# EAGLE board Digital Lockin PRE Autorouter (EAGLE 9.6.2)
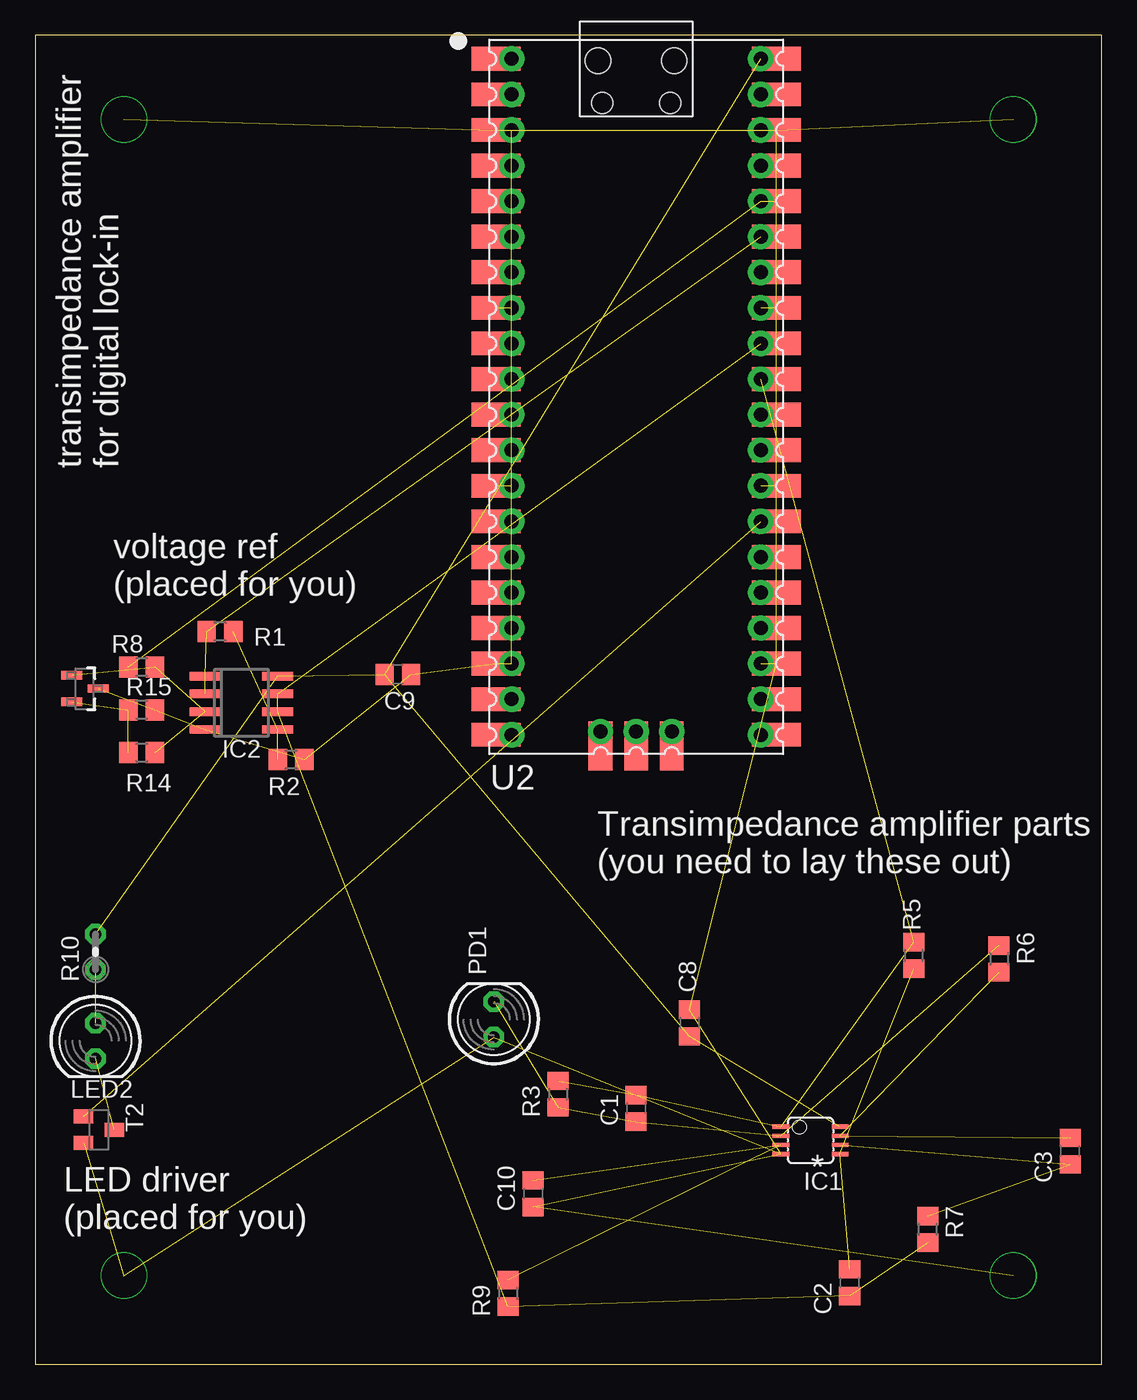
[diagram p0: board, top side]

Size 76.18 x 94.92 mm. Coordinates in mm from the lower left corner, seen from the top.
Outline: 0,0 76.18,0 76.18,94.92 0,94.92 0,0
Copper layers (1*16): Top 0.035mm / dielectric 1.6mm / Bottom 0.035mm
Design rules "jlcpcb-2layers": minimum track width 5mil, minimum drill 0.3mm, track to track 5mil, track to pad 5mil, pad to pad 5mil, via to via 5mil, smd to smd 5mil, copper to edge 0.2mm, drill to drill 6mil, minimum pad ring 10mil, minimum via ring 3mil, stop-mask expansion 4mil, vias tented up to drill 0mil, thermal gap 10mil
Net classes: 1 power: width 0.305 mm

## Footprints (pad centres in the part's own frame; a part is rotated, then mirrored left to right if it is on the bottom)
C0805 = smd 1.3 x 1.5: 1 -0.95,0; 2 0.95,0
MSOP08 = smd 0.3 x 1.2: 1 -0.976,-2.113; 2 -0.326,-2.113; 3 0.324,-2.113; 4 0.974,-2.113; 5 0.974,2.112; 6 0.324,2.112; 7 -0.326,2.112; 8 -0.976,2.112
SO08 = smd 0.6 x 2.2: 1 -1.905,-2.6; 2 -0.635,-2.6; 3 0.635,-2.6; 4 1.905,-2.6; 5 1.905,2.6; 6 0.635,2.6; 7 -0.635,2.6; 8 -1.905,2.6
LED5MM = drill 0.813 octagon: A -1.27,0; K 1.27,0
R0805 = smd 1.3 x 1.5: 1 -0.95,0; 2 0.95,0
0204V = drill 0.813 octagon: 1 -1.27,0; 2 1.27,0
SOT23-BEC = smd 1 x 1.4: B -0.95,-1.1; C 0,1.1; E 0.95,-1.1
PICO-PKG = drill 1: 1 -8.89,24.13; 2 -8.89,21.59; 3 -8.89,19.05; 4 -8.89,16.51; 5 -8.89,13.97; 6 -8.89,11.43; 7 -8.89,8.89; 8 -8.89,6.35; 9 -8.89,3.81; 10 -8.89,1.27; 11 -8.89,-1.27; 12 -8.89,-3.81; 13 -8.89,-6.35; 14 -8.89,-8.89; 15 -8.89,-11.43; 16 -8.89,-13.97; 17 -8.89,-16.51; 18 -8.89,-19.05; 19 -8.89,-21.59; 20 -8.89,-24.13; 21 8.89,-24.13; 22 8.89,-21.59; 23 8.89,-19.05; 24 8.89,-16.51; 25 8.89,-13.97; 26 8.89,-11.43; 27 8.89,-8.89; 28 8.89,-6.35; 29 8.89,-3.81; 30 8.89,-1.27; 31 8.89,1.27; 32 8.89,3.81; 33 8.89,6.35; 34 8.89,8.89; 35 8.89,11.43; 36 8.89,13.97; 37 8.89,16.51; 38 8.89,19.05; 39 8.89,21.59; 40 8.89,24.13; 41 -2.54,-23.9; 42 0,-23.9; 43 2.54,-23.9 | smd 3.5 x 1.7: P$1 -10,24.13; P$2 -10,21.59; P$3 -10,19.05; P$4 -10,16.51; P$5 -10,13.97; P$6 -10,11.43; P$7 -10,8.89; P$8 -10,6.35; P$9 -10,3.81; P$10 -10,1.27; P$11 -10,-1.27; P$12 -10,-3.81; P$13 -10,-6.35; P$14 -10,-8.89; P$15 -10,-11.43; P$16 -10,-13.97; P$17 -10,-16.51; P$18 -10,-19.05; P$19 -10,-21.59; P$20 -10,-24.13; P$21 10,-24.13; P$22 10,-21.59; P$23 10,-19.05; P$24 10,-16.51; P$25 10,-13.97; P$26 10,-11.43; P$27 10,-8.89; P$28 10,-6.35; P$29 10,-3.81; P$30 10,-1.27; P$31 10,1.27; P$32 10,3.81; P$33 10,6.35; P$34 10,8.89; P$35 10,11.43; P$36 10,13.97; P$37 10,16.51; P$38 10,19.05; P$39 10,21.59; P$40 10,24.13 | smd 1.7 x 3.5: P$41 -2.54,-24.925; P$42 0,-24.925; P$43 2.54,-24.925 | hole 1.8: -2.725,24; 2.725,24 | hole 1.5: -2.425,20.97; 2.425,20.97
DBZ0003A_N = smd 1.5 x 0.6: 1 0.95,-0.95; 2 0.95,0.95; 3 -0.95,0

## Placement (x,y rotation side)
C1  5 pF  [C0805]  42.93,18.29 90 top
C2  0.1 uF  [C0805]  58.17,5.84 270 top
C3  0.1 uF  [C0805]  73.91,15.24 270 top
C8  0.1 uF  [C0805]  46.74,24.38 90 top
C9  0.1 uF  [C0805]  25.91,49.28 180 top
C10  0.1 uF  [C0805]  35.56,12.19 90 top
IC1  OPA2650E  [MSOP08]  55.37,16 270 top
IC2  LM358D  [SO08]  14.73,47.24 270 top
LED2  DNP  [LED5MM]  4.32,23.11 270 top
PD1  DNP  [LED5MM]  32.77,24.64 90 top
R1  1k  [R0805]  13.21,52.32 180 top
R2  1k  [R0805]  18.29,43.18 180 top
R3  1M  [R0805]  37.34,19.3 270 top
R5  1M  [R0805]  62.74,29.21 270 top
R6  100k  [R0805]  68.83,28.96 270 top
R7  1M  [R0805]  63.75,9.65 90 top
R8  1 k  [R0805]  7.62,49.78 180 top
R9  100k  [R0805]  33.78,5.08 270 top
R10  DNP  [0204V]  4.32,29.46 90 top
R14  1 k  [R0805]  7.62,43.69 0 top
R15  5k  [R0805]  7.62,46.74 180 top
T2  NPN  [SOT23-BEC]  4.57,16.76 270 top
U2  RASPBERRY_PICOSMD-TH  [PICO-PKG]  42.93,69.09 0 top
U5  TL431AIDBZR  [DBZ0003A_N]  3.56,48.26 180 top

## Library data of the parts
C1 = rcl; SPICEPREFIX: C
C2 C3 C8-C10 = rcl; LCSC_PART#: C28233; SPICEPREFIX: C
IC1 = burr-brown; ACTUAL_PART: OPA2381; LCSC_PART#: C181662; OC_FARNELL: unknown; OC_NEWARK: unknown
IC2 = linear; LCSC_PART#: C7950
LED2 PD1 = led
R1 R2 R8 R14 = rcl; LCSC_PART#: C17513; SPICEPREFIX: R
R3 R5 R7 = rcl; LCSC_PART#: C17514; SPICEPREFIX: R
R6 R9 = rcl; LCSC_PART#: C149504; SPICEPREFIX: R
R10 R15 = rcl; SPICEPREFIX: R
T2 = transistor; LCSC_PART#: C2145
U2 = RpiPico
U5 = tl431; COPYRIGHT: Copyright (C) 2025 Ultra Librarian. All rights reserved.; LCSC_PART#: C3113; MANUFACTURER_PART_NUMBER: TL431AIDBZR; MFR_NAME: Texas Instruments; REFDES: RefDes; TYPE: TYPE

## Nets
3V3 [power]: R8.2 U2.36 U2.P$36
5V [power]: C8.1 C9.2 IC1.8 IC2.8 R10.2 U2.40 U2.P$40
ADCMID: C2.2 IC2.6 IC2.7 R7.1 R9.2 U2.32 U2.P$32
ADCREF: IC2.1 IC2.2 R1.2 U2.35 U2.P$35
AMPOUT: C1.2 IC1.1 R3.1 R5.1 U2.31 U2.P$31
GND [power]: C8.2 C9.1 C10.1 IC1.4 IC2.4 PD1.A R2.1 R15.1 T2.E U2.3 U2.8 U2.13 U2.18 U2.23 U2.28 U2.33 U2.38 U2.P$3 U2.P$8 U2.P$13 U2.P$18 U2.P$23 U2.P$28 U2.P$33 U2.P$38 U5.3
LEDCTRL: T2.B U2.27 U2.P$27
N$1: C3.1 IC1.7 R6.2
N$2: C3.2 IC1.6 R7.2
N$3: LED2.K T2.C
N$5: C2.1 IC1.5 R5.2
N$6: C1.1 IC1.2 PD1.K R3.2 R6.1
N$9: IC2.3 R8.1 R14.2 U5.1
N$10: IC2.5 R1.1 R2.2
N$12: LED2.A R10.1
N$13: C10.2 IC1.3 R9.1
N$20: R14.1 R15.2 U5.2
SWGND: U2.42 U2.P$42
VSYS: U2.39 U2.P$39

## Tracks (layer width: path | path; a pad name or v marks a point on that pad's centre or on a via)
3V3  (2 unrouted)
5V  (5 unrouted)
ADCMID  (5 unrouted)
ADCREF  (3 unrouted)
AMPOUT  (4 unrouted)
GND  (via drill 3.17)  (29 unrouted)
  other vias: 69.85,6.35 6.35,6.35 6.35,88.9 69.85,88.9
LEDCTRL  (1 unrouted)
N$1  (2 unrouted)
N$2  (2 unrouted)
N$3  (1 unrouted)
N$5  (2 unrouted)
N$6  (4 unrouted)
N$9  (3 unrouted)
N$10  (2 unrouted)
N$12  (1 unrouted)
N$13  (2 unrouted)
N$20  (2 unrouted)

## Text on the board
tPlace: TIPS: / turn off the ground airwires / command: ratsnest ! GND / "untangle" the remaining airwires as best you can / (see voltage ref for an example) / pour a ground plane on both sides / (use polygon on top layer(1) and then polygon on bottom layer (16) , type GND for the net name) / then use ripup/visible polygons so you can see what you're doing again / Tools->Autorouter will attempt to route the board automatically / If you do by hand, make one layer horizontal (e.g. top) wires / and one layer (e.g. bottom) vertical wires. / Use the middle mouse button to switch layers while drawing and insert a via automatically / At power supply GND and bypass capacitor grounds, try to make a short stub and then add a via (middle mouse button) / then hit esc to end on the via / this will make a connection to the ground plane on both sides of the board / After you autoroute, type ratsnest to fill the polygons and run a DRC to check for airwires. / Usually these are on the ground plane. / Add vias to ground (see above) where needed and on power supply pins/bypass caps | voltage ref / (placed for you) | Transimpedance amplifier parts / (you need to lay these out) | LED driver / (placed for you) | I have already done this, but to make the autorouter draw thick power wires (so they can carry current), use edit->net classes / to set the power nets and then rules to say a minimum width (here 12)
tNames: transimpedance amplifier / for digital lock-in | *